# Altium PCB USB Power.PcbDoc
Units mm, origin at the board's own origin, x right, y up, seen from the top; angles counter-clockwise.
Board outline 152.4 x 101.6 mm, 2 copper layers (Top Layer, Bottom Layer); 8 components, 4 nets, 27 pads, 0 vias.
Unrouted connection lines stored in the file: 1.
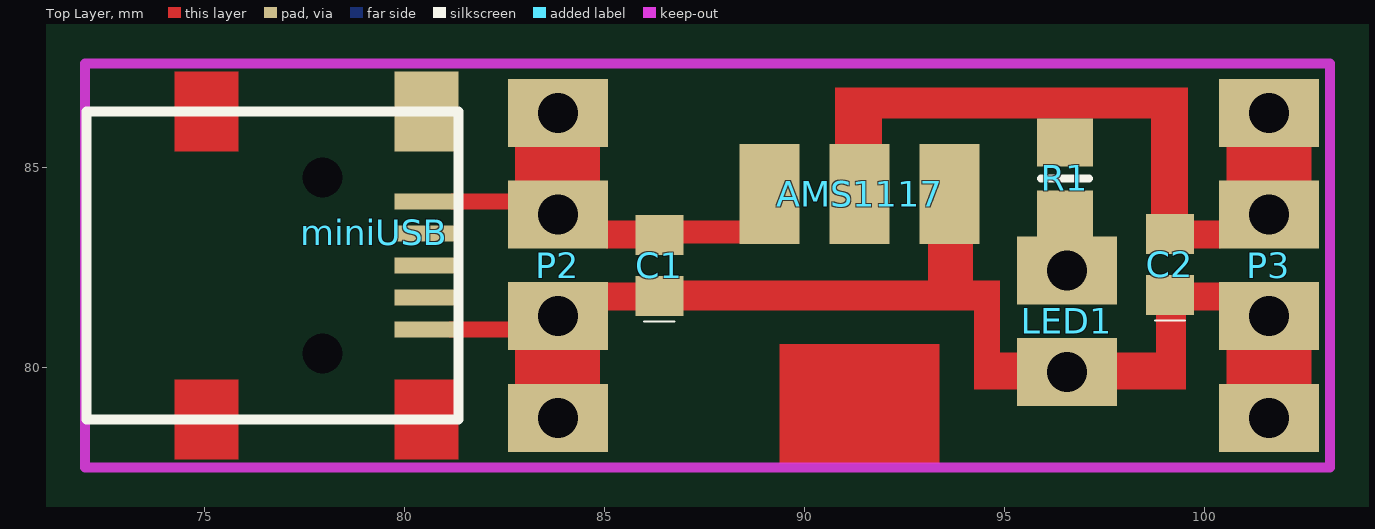
[diagram p0: Top Layer view]
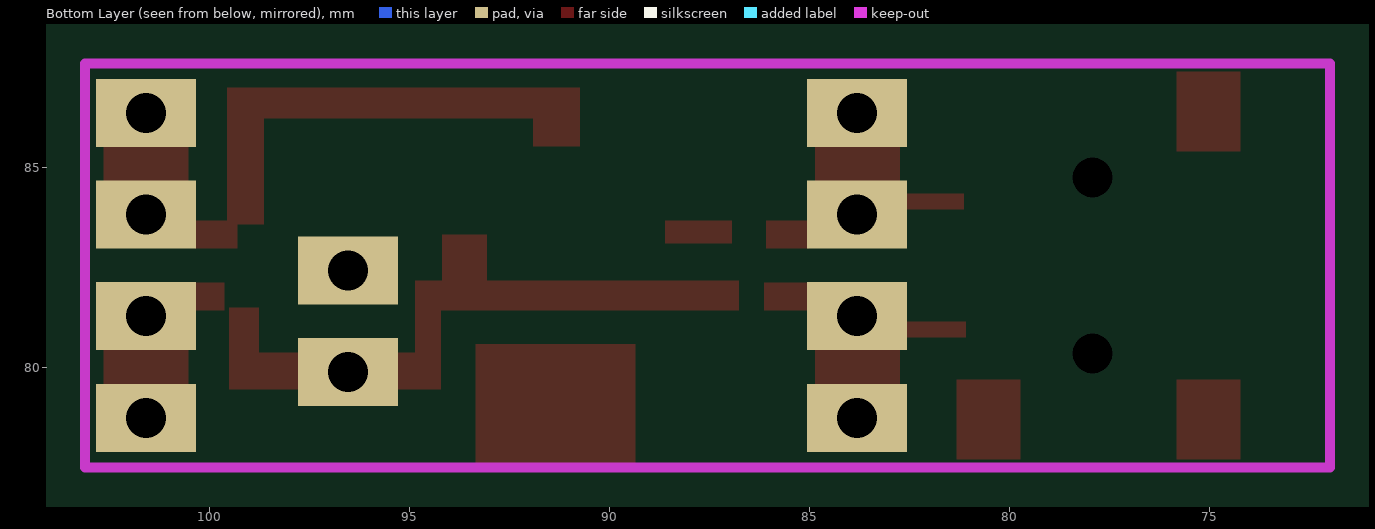
[diagram p1: Bottom Layer view, seen from below]

## Layer stack, top to bottom
Top Solder: solder mask 0.0102, Solder Resist, Dk 3.5
Top Layer: signal copper 0.0356
Dielectric 1: dielectric 0.32, FR-4, Dk 4.8
Bottom Layer: signal copper 0.0356
Bottom Solder: solder mask 0.0102, Solder Resist, Dk 3.5

## Board outline
25.4,25.4 177.8,25.4 177.8,127 25.4,127

## Design rules (kind name [scope] priority, off if disabled: settings)
Clearance [All] p1: gap=0.254
PolygonConnect [All] p1: connectstyle=Relief reliefconductorwidth=0.254 reliefentries=4 polygonreliefangle="90 Angle" airgapwidth=0.254
RoutingVias [All] p1: holewidth=0.711 width=1.27 viastyle="Through Hole" minholewidth=0.711 minwidth=1.27 maxholewidth=0.711 maxwidth=1.27
SolderMaskExpansion [All] p1: expansion=0.102
UnpouredPolygon [All] p1: allowunpoured=FALSE
Width [All] p1: maxlimit=0.254 minlimit=0.254 preferedwidth=0.254
29 further rules are at their usual default settings.

## Components (designator, comment, footprint, x,y, rotation, side; value= is the part's Value field where it differs from the comment)
AMS1117 "T1" SOT-223 94.615,85.09 r180 top
C1 "22uF" 0805-C 86.36,82.55 r90 top
C2 "22uF" 0805-C 99.125,82.575 r90 top
LED1 "LED" "LED 3mm" 96.55,82.425 r270 top
miniUSB "P1" MINIUSB 76.835,82.55 r270 top
P2 "Header 1x4 ++--" "Header 4x1 long" 83.82,86.36 r270 top
P3 "Header 1x4 ++--" "Header 4x1 long" 101.6,86.36 r270 top
R1 "100R" "R 0805 / 2012" 96.5,84.725 r270 top

## Footprints (in the part's own frame and the unit in brackets; to place one, negate y for a bottom-side part, rotate by r counter-clockwise, add the part's x,y. Pads: shape width x height; smd on the part's side, far side on the other; paste and mask are expansions set on the pad)
0805-C [mm]
  rect 1x1.2 smd mask+0.01: 1(-0.762,0) 2(0.762,0)
  silkscreen extent -1.4,-0.38 -1.4,0.38, body extent -1,-0.62 1,0.63, height 0.78
"Header 4x1 long" [mm] "2.54mm"
  rect 1.7x2.5 hole 1: 1(0,0) 2(2.54,0) 3(5.08,0) 4(7.62,0)
"LED 3mm" [mm] "2.54mm"
  rect 1.7x2.5 hole 1: 1(0,0) 2(2.54,0)
  body extent -1.71,-3.05 3.74,2.85, height 18.6
MINIUSB [mm]
  rect 0.4x1.6 smd: 1(-1.6,3.7) 2(-0.8,3.7) 3(0,3.7) 4(0.8,3.7) 5(1.6,3.7)
  rect 2x1.6 smd: 6(-3.85,3.7)
  rect 0x0 hole 1: 10(-2.2,1.1) 20(2.2,1.1)
  Top Layer region: 2.85,-2.6 4.85,-2.6 4.85,-1 2.85,-1
  Top Layer region: 2.85,2.9 4.85,2.9 4.85,4.5 2.85,4.5
  Top Layer region: -4.85,-2.6 -2.85,-2.6 -2.85,-1 -4.85,-1
  silkscreen extent -3.85,-4.8 3.85,4.5, body extent -4.95,-4.7 4.95,4.5, height 4.14
"R 0805 / 2012" [mm] "Resistor 0805 / 2012 (2.0 x 1.2 mm)"
  rect 1.2x1.4 smd: 1(-0.9,0) 2(0.9,0)
  silkscreen extent 0,-0.6 0,0.6, body extent -1,-0.62 1,0.62, height 0.45
SOT-223 [mm]
  rect 1.5x2.5 smd: 1(1,0.75) 2(3.25,0.75) 3(5.5,0.75)
  Top Layer region: 1.25,4.5 5.25,4.5 5.25,7.5 1.25,7.5
  body extent 0,0 6.5,6.89, height 1.6

## Part data
AMS1117: library part AMS1117
C1 C2: library part Capacitor
miniUSB: library part miniUSB
R1: library part Resistor

## Nets (pads, with @x,y where several pads share a name; then routed paths per layer and width w, separated by ;. In a path a pad name is that pad's centre, name@x,y a point inside that pad or via, vN(x,y) a via of type N, cw(c..) or ccw(c..) an arc to the next point about the centre after c; other vN are vias at no path point)
NetAMS1117_1: AMS1117.1 C1.1 C2.1 LED1.2 miniUSB.5 P2.3 P2.4 P3.3 P3.4
NetAMS1117_2: AMS1117.2 C2.2 P3.1 P3.2 R1.1
NetAMS1117_3: AMS1117.3 C1.2 miniUSB.1 P2.1 P2.2
NetLED1_1: LED1.1 R1.2
pads on no net: miniUSB.2 miniUSB.3 miniUSB.4 miniUSB.6 miniUSB.10 miniUSB.20

## Keep-outs
Keep-Out Layer:
  lines w0.254: 72,77.5 72,87.6 103.124,87.6 103.124,77.5 72,77.5

## Other copper
Top Layer:
  rectangle net NetAMS1117_1: 98.775,80.375 99.525,81.5
  rectangle net NetAMS1117_1: 94.875,79.45 99.525,80.375
  rectangle net NetAMS1117_1: 94.225,79.45 94.875,81.425
  rectangle net NetAMS1117_1: 82.75,79.4 84.875,80.5
  rectangle net NetAMS1117_1: 81.1,80.75 82.7,81.15
  rectangle net NetAMS1117_1: 100.54,79.25 102.665,80.5
  rectangle net NetAMS1117_2: 100.54,84.6 102.665,85.55
  rectangle net NetAMS1117_3: 82.75,84.625 84.875,85.6
  rectangle net NetAMS1117_3: 81.15,83.95 82.65,84.35
  rectangle net NetAMS1117_1: 86.775,81.425 94.875,82.175
  rectangle net NetAMS1117_1: 93.075,81.95 94.2,83.325
  rectangle net NetAMS1117_1: 85.075,81.425 86.15,82.125
  rectangle net NetAMS1117_1: 99.64,81.425 100.59,82.125
  rectangle net NetAMS1117_3: 85.025,82.975 86.1,83.675
  rectangle net NetAMS1117_2: 99.315,82.975 100.39,83.675
  rectangle net NetAMS1117_3: 86.95,83.1 88.625,83.675
  rectangle net NetAMS1117_2: 90.75,85.525 91.925,87
  rectangle net NetAMS1117_2: 91.925,86.225 99.575,87
  rectangle net NetAMS1117_2: 98.65,83.575 99.575,86.225